# Altium PCB H_Bridge.PcbDoc
Units mm, origin at the board's own origin, x right, y up, seen from the top; angles counter-clockwise.
Board outline 64.9 x 45.34 mm, 2 copper layers (Top Layer, Bottom Layer); 33 components, 27 nets, 131 pads, 157 vias.
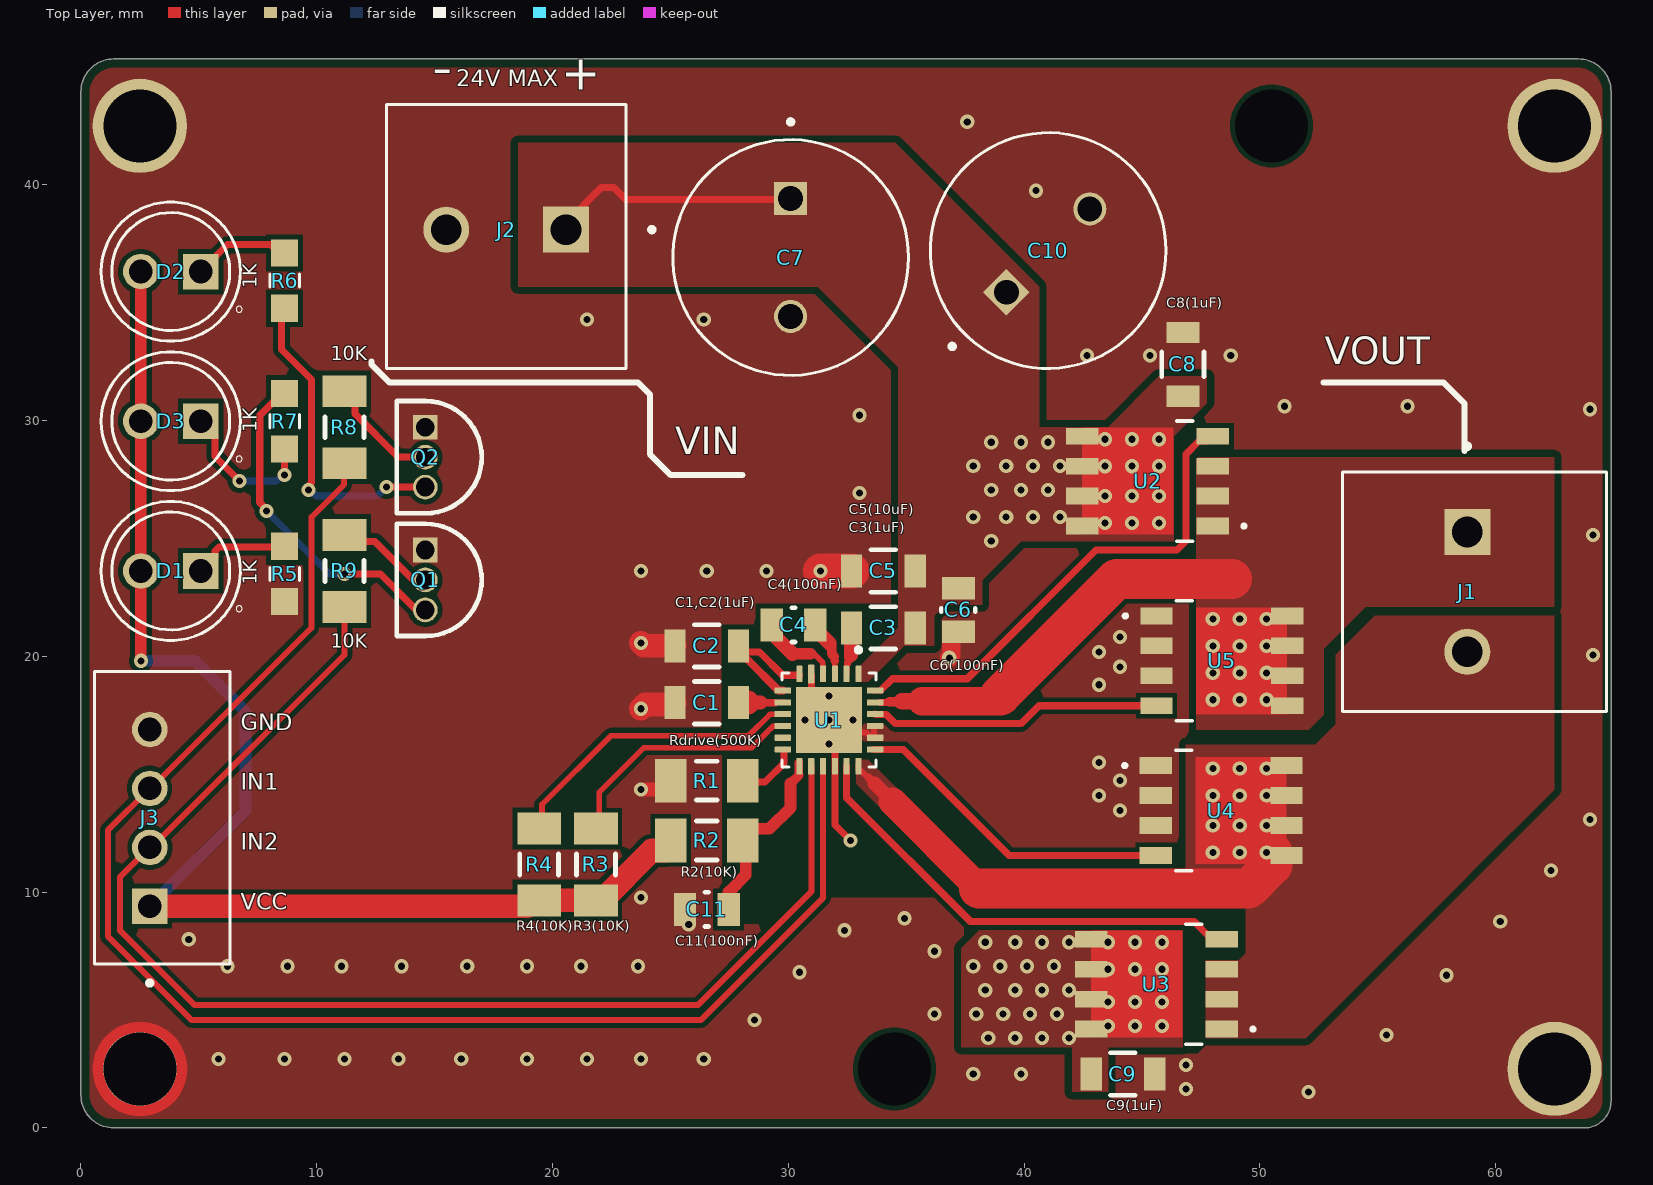
[diagram p0: Top Layer view]
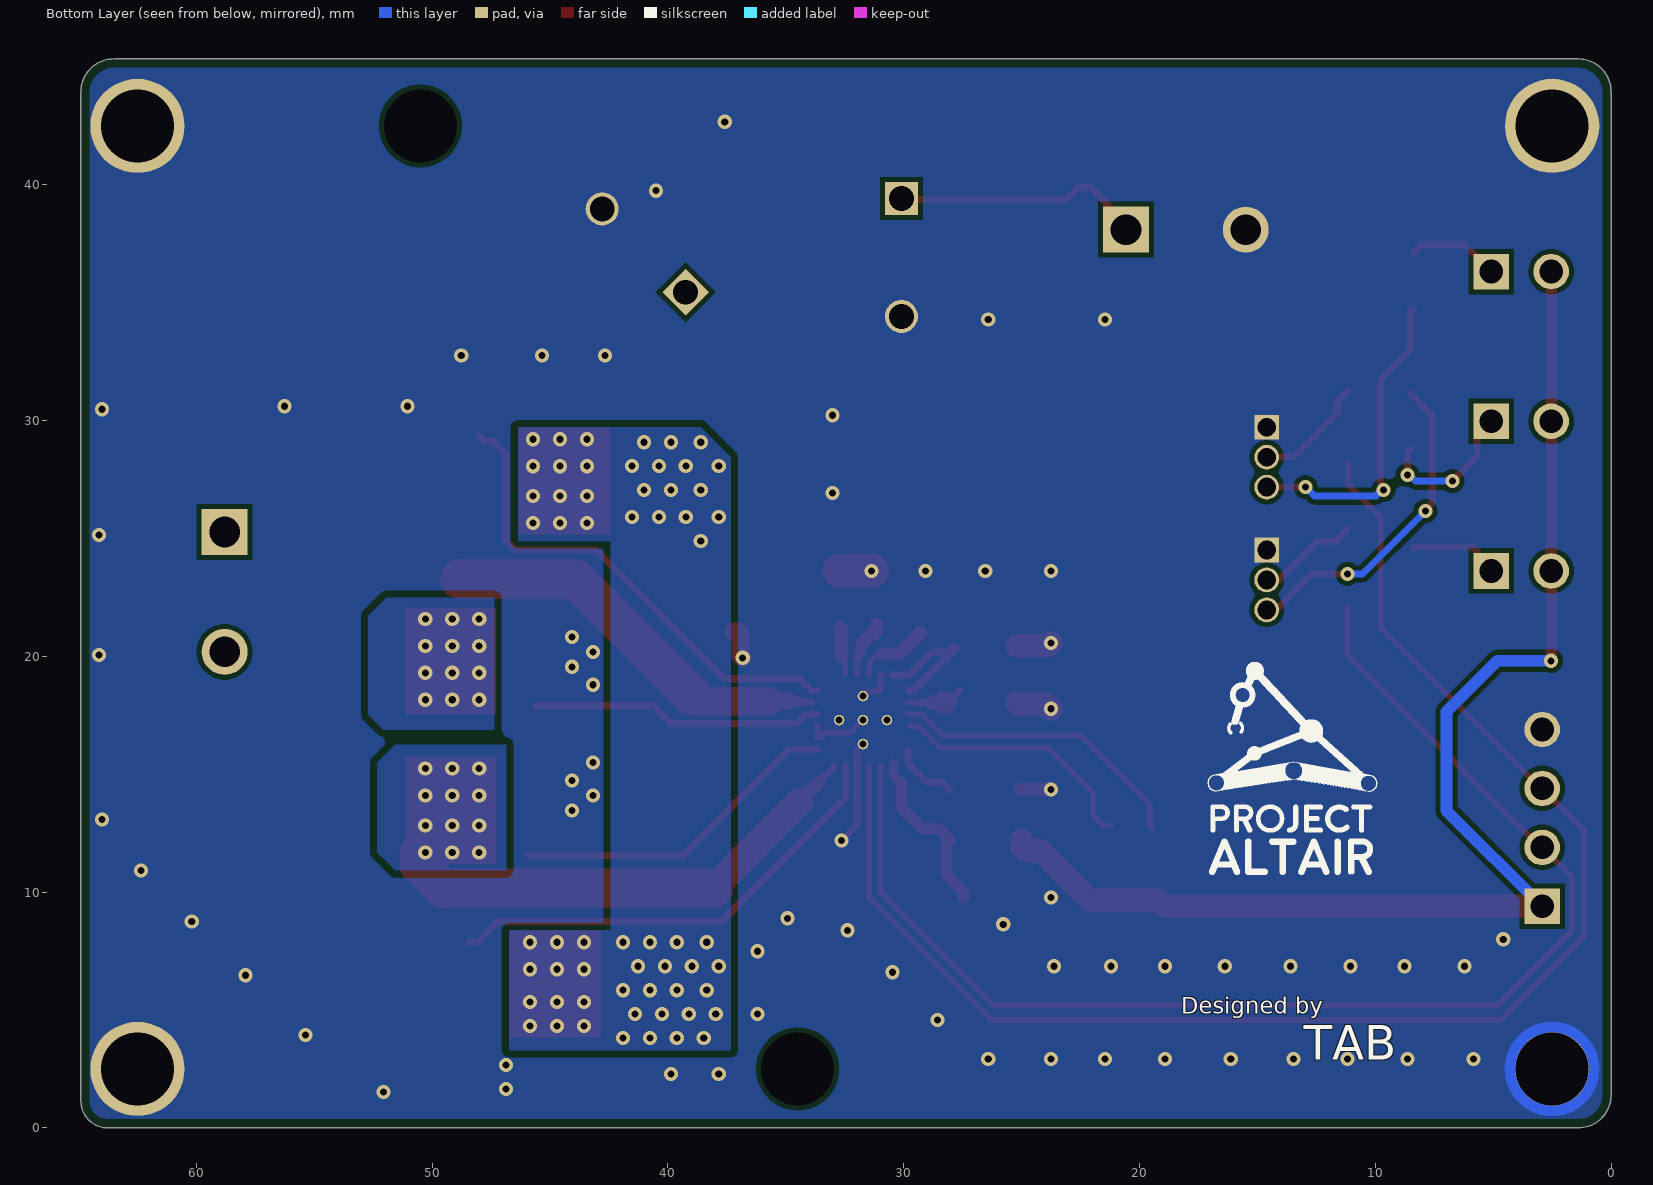
[diagram p1: Bottom Layer view, seen from below]
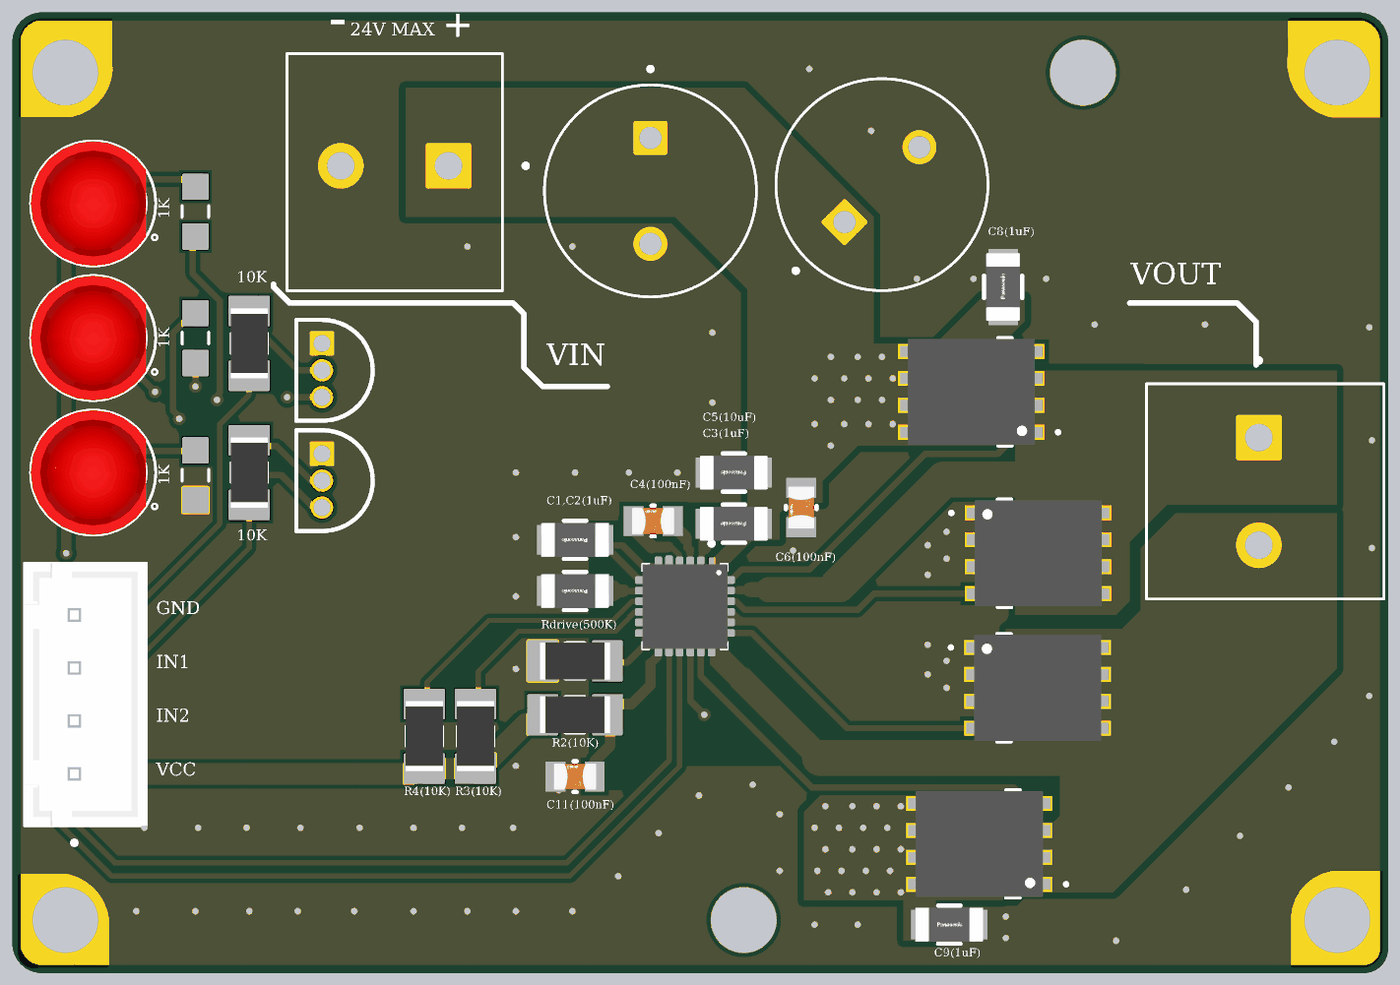
[diagram p2: 3D render of the assembled board from above, using the file's embedded part models]

## Layer stack, top to bottom
Top Solder: solder mask 0.0102, Solder Resist, Dk 3.5
Top Layer: signal copper 0.0356
Dielectric 1: dielectric 0.32, FR-4, Dk 4.8
Bottom Layer: signal copper 0.0356
Bottom Solder: solder mask 0.0102, Solder Resist, Dk 3.5

## Board outline
0,1.397 0,4.128 0,43.434 0,43.942 cw(c1.397,43.942) 1.397,45.34 63.5,45.34 cw(c63.5,43.942) 64.898,43.942 64.898,1.143 cw(c63.754,1.143) 63.754,0 1.397,0 cw(c1.397,1.397)

## Design rules (kind name [scope] priority, off if disabled: settings)
Clearance Clearance_1 [All] p1: gap=0.2 ignorepadtopadclearanceinfootprint=FALSE except(0: Arc-Text Track-Text SMDPad-Text THPad-Text Via-Text Fill-Text Poly-Text Region-Text Text-Text; 0.3: Fill-Fill Fill-Poly Fill-Region Poly-Poly Poly-Region Region-Region)
Clearance [All] p2: gap=0.2 ignorepadtopadclearanceinfootprint=FALSE except(0: Arc-Text Track-Text SMDPad-Text THPad-Text Via-Text Fill-Text Poly-Text Region-Text Text-Text; 0.3: Fill-Fill Fill-Poly Fill-Region Poly-Poly Poly-Region Region-Region)
HoleSize [All] p1: absolutevalues=TRUE maxlimit=6 minlimit=0.2 maxpercent=80.000 minpercent=20.000
HoleToHoleClearance [All] p1: gap=0.4 allowstackedmicrovias=TRUE
PasteMaskExpansion [All] p1: expansion=0.05
PlaneClearance [All] p1: clearance=0.6
PlaneConnect [All] p1: planeconnectstyle=Direct reliefexpansion=0.508 reliefentries=4 reliefconductorwidth=0.254 reliefairgap=0.254
PolygonConnect [All] p1: connectstyle=Direct reliefconductorwidth=0.254 reliefentries=4 polygonreliefangle="90 Angle" airgapwidth=0.254
RoutingVias [All] p1: holewidth=0.6 width=0.8 viastyle="Through Hole" minholewidth=0.2 minwidth=0.45 maxholewidth=6 maxwidth=6
SolderMaskExpansion [All] p1: expansion=0.102 istentingtop=FALSE
UnRoutedNet [All] p1: checkbadconnections=TRUE
Width [All] p1: maxlimit=2 minlimit=0.2 preferedwidth=0.254
24 further rules are at their usual default settings.

## Components (designator, comment, footprint, x,y, rotation, side; value= is the part's Value field where it differs from the comment)
C1 "1uF/35V" FP-ECHUH3-MFG 26.543,18.034 r180 top
C2 "1uF/35V" FP-ECHUH3-MFG 26.543,20.447 r180 top
C3 "1uF/35V" FP-ECHUH3-MFG 34.036,21.209 r180 top
C4 "100nF/50V" FP-CC0805-0_85-MFG 30.226,21.336 r180 top value="1 uF"
C5 "10uF/35V" FP-ECHUH3-MFG 34.036,23.622 r180 top
C6 "100nF/50V" FP-CC0805-0_85-MFG 37.211,21.971 r270 top value="1 uF"
C7 "470uF/35V" CAPPRD500W80D1000H1170 30.099,36.917 r270 top
C8 "1uF/35V" FP-ECHUH3-MFG 46.736,32.385 r90 top
C9 "1uF/35V" FP-ECHUH3-MFG 44.196,2.286 r0 top
C10 "470uF/35V" CAPPRD500W80D1000H1170 41.021,37.211 r45 top
C11 "100nF/50V" FP-CC0805-0_85-MFG 26.543,9.271 r180 top value="1 uF"
D1 "WP7113ID" LED_WP7113ID 3.81,23.622 r180 top
D2 "WP7113ID" LED_WP7113ID 3.81,36.322 r180 top
D3 "WP7113ID" LED_WP7113ID 3.81,29.972 r180 top
J1 "1711725" PHOENIX_1711725 53.501,27.813 r270 top
J2 "1711725" PHOENIX_1711725 23.114,43.4 r180 top
J3 "B4B-XH-A" JST_B4B-XH-A 3.446,13.148 r270 top
Q1 "2N3904BU" FAIR-TO-92 14.605,24.511 r270 top
Q2 "2N3904BU" FAIR-TO-92 14.605,29.718 r270 top
R1 "33K" RESC3216X60X45ML15T20 26.543,14.732 r180 top value=500K
R2 "10K" RESC3216X60X45ML15T20 26.543,12.192 r180 top
R3 "10K" RESC3216X60X45ML15T20 21.844,11.176 r90 top
R4 "10K" RESC3216X60X45ML15T20 19.431,11.176 r90 top value=10k
R5 "1K" RES_ERA6AED822V 8.636,23.495 r90 top
R6 "1K" RES_ERA6AED822V 8.636,35.941 r90 top
R7 "1K" RES_ERA6AED822V 8.636,29.972 r90 top
R8 "10K" RESC3216X60X45ML15T20 11.176,29.719 r270 top value=10k
R9 "10K" RESC3216X60X45ML15T20 11.176,23.622 r270 top value=10k
U1 "DRV8701ERGET" QFN50P400X400X100-25N 31.727,17.299 r270 top
U2 "CSD18532Q5B" DNK8 45.236,27.432 r180 top
U3 "CSD18532Q5B" DNK8 45.617,6.096 r180 top
U4 "CSD18532Q5B" DNK8 48.363,13.462 r0 top
U5 "CSD18532Q5B" DNK8 48.387,19.812 r0 top

## Footprints (in the part's own frame and the unit in brackets; to place one, negate y for a bottom-side part, rotate by r counter-clockwise, add the part's x,y. Pads: shape width x height; smd on the part's side, far side on the other; paste and mask are expansions set on the pad)
CAPPRD500W80D1000H1170 [mm]
  round 1.4 hole 1.05: N(2.5,0)
  rect 1.4x1.4 / inner round 1.4 / far side rect 1.4x1.4 hole 1.05: P(-2.5,0)
  silkscreen extent -5.85,-5 5,5
DNK8 [mm]
  rect 1.372x0.71 smd paste-0.673 mask-0.686: 1(-2.77,1.905) 2(-2.77,0.635) 3(-2.77,-0.635) 4(-2.77,-1.905) 5(2.77,-1.905) 6(2.77,-0.635) 7(2.77,0.635) 8(2.77,1.905)
  Top Layer region: 2.765,-2.26 2.765,2.26 -1.085,2.26 -1.085,-2.26
  Top Layer region: 2.765,-2.26 2.765,2.26 -1.085,2.26 -1.085,-2.26
  silkscreen extent -1.92,-2.55 -1.25,2.55, body extent -3,-2.5 3,2.5, height 1.06
FAIR-TO-92 [mm] "TO, 3-Leads, Body Dia 4.79mm, Pitch 1.27mm"
  rect 1.05x1.05 hole 0.8 mask+0.05: 1(0,0)
  round 1.05 hole 0.8 mask+0.05: 2(1.27,0) 3(2.54,0)
  silkscreen extent -1.11,-1.21 3.65,2.4, body extent -1.11,-1.21 3.65,2.4, height 5.33
FP-CC0805-0_85-MFG [mm]
  rect 0.95x1.4 smd paste+0 mask+0: 1(-0.925,0) 2(0.925,0)
  silkscreen extent -0.08,-0.72 0.08,0.72, body extent -1.6,-1.05 1.6,1.05, height 0.25
FP-ECHUH3-MFG [mm]
  rect 0.9x1.4 smd paste+0 mask+0: 1(-1.35,0) 2(1.35,0)
  silkscreen extent -0.53,-0.9 0.53,0.9, body extent -1.9,-1 1.9,1, height 0.25
JST_B4B-XH-A [mm]
  rect 1.508x1.508 / inner round 1.508 / far side rect 1.508x1.508 hole 1: 1(3.75,-0.525)
  round 1.508 hole 1: 2(1.25,-0.525) 3(-1.25,-0.525) 4(-3.75,-0.525)
  silkscreen extent -6.2,-2.88 7.1,2.88, body extent -6.2,-2.88 6.2,2.88, height 7
LED_WP7113ID [mm]
  round 1.508 hole 1: A(1.27,0)
  rect 1.508x1.508 / inner round 1.508 / far side rect 1.508x1.508 hole 1: C(-1.27,0)
  silkscreen extent -3.03,-2.95 2.95,2.95, body extent -2.5,-2.95 2.95,2.95, height 9.6
PHOENIX_1711725 [mm]
  rect 1.95x1.95 / inner round 1.95 / far side rect 1.95x1.95 hole 1.3: 1(2.54,5.3)
  round 1.95 hole 1.3: 2(7.62,5.3)
  silkscreen extent -1.2,0 10.16,11.2
QFN50P400X400X100-25N [mm]
  rrect25% 0.7x0.26 smd paste+0 mask+0.051: 1(-1.955,1.25)
  rrect25% 0.7x0.26 smd mask+0.051: 2(-1.955,0.75) 3(-1.955,0.25) 4(-1.955,-0.25) 6(-1.955,-1.25) 13(1.955,-1.25) 14(1.955,-0.75) 15(1.955,-0.25) 16(1.955,0.25) 17(1.955,0.75) 18(1.955,1.25)
  rrect25% 0.81x0.26 smd mask+0.051: 5(-1.955,-0.75)
  rrect25% 0.26x0.7 smd mask+0.051: 7(-1.25,-1.955) 8(-0.75,-1.955) 9(-0.25,-1.955) 10(0.25,-1.955) 11(0.75,-1.955) 12(1.25,-1.955) 19(1.25,1.955) 20(0.75,1.955) 21(0.25,1.955) 22(-0.25,1.955) 23(-0.75,1.955) 24(-1.25,1.955)
  rect 2.8x2.8 smd paste-2 mask+0.051: 25(0,0)
  round 0.45 hole 0.3 mask+0: 26(0,1.016) 27(-1.016,0) 28(0,0) 29(1.016,0) 30(0,-1.016)
  silkscreen extent -3.07,-2 2,2, body extent -2,-2 2,2, height 1
RES_ERA6AED822V [mm]
  rect 1.15x1.15 smd: 1(-1.175,0) 2(1.175,0)
  silkscreen extent -0.28,-0.63 0.28,0.63
RESC3216X60X45ML15T20 [mm] "Chip Resistor, 2-Leads, Body 3.3x1.75mm, IPC Low Density"
  rect 1.35x1.85 smd: 1(-1.525,0) 2(1.525,0)
  silkscreen extent -0.45,-0.82 0.45,0.82, body extent -1.65,-0.87 1.65,0.87, height 0.6

## Part data
C1 C3 C8 C9: library part CMP-05434-000006-1, "1uF/35V MLCC", Capacitance=47nF, Case Code (Imperial)=1206, Case Code (Metric)=3216, Dielectric=PPS, Dielectric Material=Polyphenylene, Insulation Resistance=3GR, Max Operating Temperature=125°C, Min Operating Temperature=-55°C, Package Quantity=2000, Tolerance=2%, Voltage=16V, Case/Package=1206, Construction=Flat, Contact Plating=Copper, Depth=1.6mm, Height=1.5mm, Height - Seated (Max)=0.067inch, Lead Free="Lead Free", Length=3.2mm, Life (Hours)=500Hour, Mount="Surface Mount", Packaging="Tape and Reel", Radiation Hardening=No, REACH SVHC="No SVHC", RoHS Compliant=Yes, Series=ECHU(X), Termination=SMD/SMT, Voltage Rating=16V, Voltage Rating (DC)=16V, Weight=0.000353oz, Width=0.063inch
C2: library part CMP-05434-000006-1, "1uF/35V MLCC", Capacitance=1uF, Case Code (Imperial)=1206, Case Code (Metric)=3216, Dielectric=PPS, Dielectric Material=Polyphenylene, Insulation Resistance=3GR, Max Operating Temperature=125°C, Min Operating Temperature=-55°C, Package Quantity=2000, Tolerance=2%, Voltage=16V, Case/Package=1206, Construction=Flat, Contact Plating=Copper, Depth=1.6mm, Height=1.5mm, Height - Seated (Max)=0.067inch, Lead Free="Lead Free", Length=3.2mm, Life (Hours)=500Hour, Mount="Surface Mount", Packaging="Tape and Reel", Radiation Hardening=No, REACH SVHC="No SVHC", RoHS Compliant=Yes, Series=ECHU(X), Termination=SMD/SMT, Voltage Rating=16V, Voltage Rating (DC)=16V, Weight=0.000353oz, Width=0.063inch
C4 C6 C11: library part CMP-03422-001106-1, "100nF/50V MLCC", Capacitance="1 uF", Manufacturer=Yageo, Manufacturer Part Number=CC0805MKX7R6BB105, Package=CC0805-0.85, Temperature="-30°C to +85°C", Temperature Characteristic=X7R, Temperature Range High=+85°C, Temperature Range Low=-30°C, Tolerance=0.2, Voltage Rating="10 V", Automotive=No, Category=Cap, ComponentLink2Description=Datasheet, ComponentLink2URL=http://www.yageo.com/documents/recent/UPY-GPHC_Y5V_6.3V-to-50V_8.pdf, Device Class L1="Passive Components", Device Class L2=Capacitors, Device Class L3="Ceramic Capacitors", Digikey Description="CAP CER 1UF 10V X7R 0805", Footprint Url=http://www.yageo.com/exep/pages/download/literatures/UPY-C_GEN_24.pdf, Height=0.95mm, Ipc Land Pattern Name=CAPC200125X85, Lead Free=Yes, Material=Ceramic, Mouser Description="Multilayer Ceramic Capacitors MLCC - SMD/SMT 1.0uF 10V X7R 20%", Octopart=https://octopart.com/cc0805mkx7r6bb105-yageo-71334590, RoHS=TRUE
C5: library part CMP-05434-000006-1, "10uF/35V MLCC", Capacitance=47nF, Case Code (Imperial)=1206, Case Code (Metric)=3216, Dielectric=PPS, Dielectric Material=Polyphenylene, Insulation Resistance=3GR, Max Operating Temperature=125°C, Min Operating Temperature=-55°C, Package Quantity=2000, Tolerance=2%, Voltage=16V, Case/Package=1206, Construction=Flat, Contact Plating=Copper, Depth=1.6mm, Height=1.5mm, Height - Seated (Max)=0.067inch, Lead Free="Lead Free", Length=3.2mm, Life (Hours)=500Hour, Mount="Surface Mount", Packaging="Tape and Reel", Radiation Hardening=No, REACH SVHC="No SVHC", RoHS Compliant=Yes, Series=ECHU(X), Termination=SMD/SMT, Voltage Rating=16V, Voltage Rating (DC)=16V, Weight=0.000353oz, Width=0.063inch
C7 C10: library part EEHAZSV471UB, Package=None, Availability=Unavailable, MF="{'manufacturer': u'Panasonic Electronic Components'}", MP=EEHAZSV471UB, Price=None
D1 D2 D3: "Red 617nm LED Indication - Discrete 2V Radial", Package="Radial Kingbright", Availability="In Stock", Check_prices=https://www.snapeda.com/parts/WP7113ID/Kingbright/view-part/?ref=eda, MF=Kingbright, MP=WP7113ID, Price=None, Purchase-URL=https://pricing.snapeda.com/search/part/WP7113ID/?ref=eda, SnapEDA_Link=https://www.snapeda.com/parts/WP7113ID/Kingbright/view-part/?ref=snap
J1 J2: "PCB Terminal Screw 5.08mm 12AWG 400V 24A 2 Position COMBICON MKDS Series", Package=None, Check_prices=https://www.snapeda.com/parts/1711725/Phoenix+Contact/view-part/?ref=eda, MF="Phoenix Contact", MP=1711725, SnapEDA_Link=https://www.snapeda.com/parts/1711725/Phoenix+Contact/view-part/?ref=snap
J3: "Connector Header Through Hole 4 position 0.098 (2.50mm)", Package=None, Check_prices=https://www.snapeda.com/parts/B4B-XH-A/JST/view-part/?ref=eda, MF="JST Sales", MP=B4B-XH-A, SnapEDA_Link=https://www.snapeda.com/parts/B4B-XH-A/JST/view-part/?ref=snap
Q1 Q2: library part CMP-2000-04944-1, "NPN General-Purpose Amplifier, 40 V VCEO, 0.2 A, -55 to 150 degC, 2-Pin TO-92, RoHS, Bulk", Manufacturer=FairchildSemiconductor, Maximum Collector Base Voltage=60V, Maximum Collector Emitter Saturation Voltage=0.2@1mA@10mA, Maximum Collector Emitter Voltage=40V, Maximum DC Collector Current=0.2A, Maximum Operating Frequency=300(Min)MHz, Maximum Power Dissipation=625mW, Minimum DC Current Gain=40@0.1mA@1V, Operating Temperature=-55to150degC, Package=3TO-92, Package Description="3-Pin Transistor Outline Package, Body Dia 4.79 mm, Pitch 1.27 mm", Package Reference=TO-92, Category=GPBJT, Datasheet URL=https://datasheet.ciiva.com/4722/2n3904-82270-4722369.pdf, Datasheet Version="Rev. 1.1.0, 10/2014", Manufacturer URL=https://www.fairchildsemi.com/, Mounting=ThroughHole, Packaging=Bulk, Pin Count=3, Rad Hard=No, Type=NPN
R1 R2 R3: library part CMP-009-00025-5, "Chip Resistor, 100 KOhm, +/- 1%, 0.25 W, -55 to 155 degC, 1206 (3216 Metric)", Case/Package=1206, Max Operating Temperature=155°C, Min Operating Temperature=-55°C, Power=250mW, Tolerance=1%, Voltage Rating=200V, Mounting Technology=SM, Pins=2, RoHS Compliant=True
R4 R8 R9: library part CMP-009-00025-5, "10K 1206", Case/Package=1206, Max Operating Temperature=155°C, Min Operating Temperature=-55°C, Power=250mW, Tolerance=1%, Voltage Rating=200V, Mounting Technology=SM, Pins=2, RoHS Compliant=True
R5 R6 R7: library part ERA6AED822V, Package=None, Availability=Unavailable, MP=ERA6AED822V, Price=None
U1: "47-V H-bridge smart gate driver", Package="QFN-24 Texas Instruments", Availability="In Stock", Check_prices=https://www.snapeda.com/parts/DRV8701ERGET/Texas+Instruments/view-part/?ref=eda, MF="Texas Instruments", MP=DRV8701ERGET, Price=None, Purchase-URL=https://pricing.snapeda.com/search/part/DRV8701ERGET/?ref=eda, SnapEDA_Link=https://www.snapeda.com/parts/DRV8701ERGET/Texas+Instruments/view-part/?ref=snap
U2 U3 U4 U5: "60-V, N channel NexFETâ„¢ power MOSFET, single SON 5 mm x 6 mm, 3.2 mOhm 8-VSON-CLIP -55 to 150", Manufacturer_Name="Texas Instruments", Copyright="Copyright (C) 2025 Ultra Librarian. All rights reserved.", Manufacturer_Part_Number=CSD18532Q5B, RefDes=RefDes, Type=Type

## Free pads (board coordinates)
  round 3.125 / inner round 1.524 / far side round 3.125 hole 3.1 mask-2539.97: 4(2.5,2.5)
  round 4 / inner round 1.524 / far side round 4 hole 3.1 mask-2539.97: 4(2.5,42.5) 4(62.5,2.5) 4(62.5,42.5)
  round 0 / inner round 1.524 / far side round 0 hole 3.1 mask-2539.97: M3_1(50.5,42.5) M3_2(34.5,2.5)
  round 0.5 on Top Overlay: ""(2.54,25.019) ""(2.54,31.369) ""(2.54,37.719)

## Via types
v1: diameter 0.6, hole 0.3, Top Layer to Bottom Layer, tented top, 157 vias

## Nets (pads, with @x,y where several pads share a name; then routed paths per layer and width w, separated by ;. In a path a pad name is that pad's centre, name@x,y a point inside that pad or via, vN(x,y) a via of type N, cw(c..) or ccw(c..) an arc to the next point about the centre after c; other vN are vias at no path point)
AVDD: C2.1 U1.6 U1.7 | length 5.8
  Top Layer w0.3: C2.1 28.148,20.193 28.775,20.193 29.768,19.199 U1.6@30.477,19.199
  Top Layer w0.34: C2.1@27.768,20.322 28.173,19.917 28.216,19.917 29.584,18.549 U1.7
CPL: C4.2 U1.4 | length 3.2
  Top Layer w0.24: 30.945,20.109 31.091,20.109 31.467,19.733 31.467,19.264 U1.4
  Top Layer w0.5: 30.176,20.109 30.945,20.109
  Top Layer w0.6: C4.2@29.301,20.984 30.176,20.109
DVDD: C1.1 U1.8 | length 2.2
  Top Layer w0.24: U1.8@29.464,18.034 29.479,18.049 U1.8@29.827,18.049
  Top Layer w0.3: C1.1@27.593,18.584 27.893,18.284 C1.1 ; 28.82,18.044 28.829,18.034 U1.8@29.464,18.034
  Top Layer w0.6: C1.1@28.284,18.044 28.82,18.044
  Top Layer w1: C1.1@28.274,18.034 C1.1@28.284,18.044
FAULT: R4.2 U1.9 | length 12.9
  Top Layer w0.24: R4.2 19.558,12.828 19.558,13.716 22.478,16.636 28.32,16.636 29.223,17.539 29.817,17.539 U1.9@29.827,17.549
GH1: U1.17 U3.4 | length 19.8
  Top Layer w0.3: U1.17 32.477,14.005 37.719,8.763 47.212,8.763 47.851,8.124 47.851,8.079 48.056,7.874 U3.4@48.387,7.874
GH2: U1.24 U2.4 | length 21
  Top Layer w0.24: U1.24@33.627,18.549 U1.24@33.916,18.549
  Top Layer w0.3: U1.24@33.916,18.549 34.417,19.05 37.592,19.05 43.053,24.511 46.482,24.511 46.863,24.892 46.863,28.575 47.42,29.132 47.801,29.132 U2.4
GL1: U1.19 U4.4 | length 14.2
  Top Layer w0.3: U1.19@33.627,16.049 34.878,16.049 39.37,11.557 U4.4@45.921,11.557
GL2: U1.22 U5.4 | length 12.4
  Top Layer w0.3: U1.22 33.702,17.529 34.158,17.529 34.542,17.145 39.878,17.145 40.64,17.907 U5.4
GND: C1.2 C2.2 C5.2 C6.2 C7.N C8.2 C9.2 C10.N C11.2 J2.2 J3.4 pad.4 Q1.1 Q2.1 R1.2 R5.1 U1.5 U1.16 U1.20 U1.21 U1.25 U1.26 U1.27 U1.28 U1.29 U1.30 U4.1 U4.2 U4.3 U5.1 U5.2 U5.3 | length 15.8
  Top Layer w0.254: U1.25 32.254,16.772 33.311,16.772 33.459,16.624 33.459,16.552 33.462,16.549 U1.20 ; U1.20@33.627,16.549 33.627,17.049 U1.21
  Top Layer w0.3: U1.5@30.977,19.199 30.977,18.549 U1.25@31.727,18.449 ; U1.29 31.977,16.033 31.977,12.854 v1(32.639,12.192)
  Top Layer w0.6: v1(23.749,14.351) R1.2@25.018,14.351
  Top Layer w0.8: v1(36.83,19.939) 36.911,20.02 36.911,20.971 36.986,21.046 C6.2
  Top Layer w1: v1(23.749,17.78) 23.927,17.958 25.143,17.958 25.143,17.984 C1.2 ; v1(23.749,20.574) 23.864,20.46 25.181,20.46 C2.2
  Top Layer w1.5: v1(31.369,23.622) C5.2
  other v1: 52.07,1.524 46.863,1.651 37.846,2.286 39.878,2.286 46.863,2.667 5.842,2.921 8.636,2.921 11.176,2.921 13.462,2.921 16.129,2.921 18.923,2.921 21.463,2.921 23.749,2.921 26.416,2.921 55.372,3.937 28.575,4.572 36.195,4.826 57.912,6.477 30.48,6.604 6.223,6.858 8.763,6.858 11.049,6.858 13.589,6.858 16.383,6.858 18.923,6.858 21.209,6.858 23.622,6.858 36.195,7.493 4.572,8.001 32.385,8.382 25.781,8.636 60.198,8.763 34.925,8.89 23.749,9.779 62.357,10.922 64.008,13.081 44.069,13.462 43.18,14.097 44.069,14.732 43.18,15.494 43.18,18.796 44.069,19.558 64.135,20.066 43.18,20.193 44.069,20.828 23.749,23.622 26.543,23.622 29.083,23.622 64.135,25.146 33.02,26.924 33.02,30.226 64.008,30.48 51.054,30.607 56.261,30.607 42.672,32.766 45.339,32.766 48.768,32.766 21.463,34.29 26.416,34.29 40.513,39.751 37.592,42.672
IDRIVE: R1.1 U1.12 | length 2.8
  Top Layer w0.3: R1.1@28.068,14.351 28.384,14.667 29.018,14.667 29.827,15.476 U1.12@29.827,16.029
IN1: J3.3 R8.2 U1.15 | length 63.8
  Top Layer w0.254: R8.2 11.158,28.175 11.158,27.287 9.779,25.908 9.779,21.209 2.968,14.398 J3.3 1.143,12.62 1.143,8.128 4.699,4.572 26.289,4.572 31.477,9.76 U1.15
IN2: J3.2 R9.2 U1.14 | length 55.7
  Top Layer w0.254: R9.2 11.176,20.066 3.008,11.898 J3.2 1.651,10.628 1.651,8.382 4.826,5.207 26.162,5.207 30.977,10.022 U1.14
NetC4_1: C4.1 U1.3 | length 2.5
  Top Layer w0.24: U1.3@31.972,19.204 31.972,19.812
  Top Layer w0.35: 31.962,19.863 31.962,19.822 31.972,19.812
  Top Layer w0.4: 31.736,20.562 31.836,20.462 31.836,20.107 31.962,19.981
  Top Layer w0.5: 31.736,20.479 31.736,20.562
  Top Layer w0.6: C4.1 31.151,21.111 31.326,20.936 31.362,20.936 31.736,20.562
NetD1_C: D1.C R5.2 | length 4.2
  Top Layer w0.3: D1.C@4.826,23.622 D1.C 5.684,24.226 5.684,24.463 5.86,24.638 8.287,24.638 R5.2@8.382,24.543
NetD2_C: D2.C R6.2 | length 3.9
  Top Layer w0.3: D2.C 6.223,37.465 8.033,37.465 R6.2@8.382,37.116
NetD3_C: D3.C R7.1 | length 6.4
  Top Layer w0.3: D3.C 5.684,29.368 5.684,28.479 v1(6.731,27.432) ; R7.1@8.509,28.797 8.636,28.67 v1(8.636,27.686)
  Bottom Layer w0.3: v1(6.731,27.432) 8.301,27.432 8.555,27.686 v1(8.636,27.686)
NetQ1_2: Q1.2 R9.1 | length 4.3
  Top Layer w0.3: R9.1@11.176,25.4 11.701,24.875 12.463,24.875 14.097,23.241 Q1.2
NetQ1_3: Q1.3 R7.2 | length 13.6
  Top Layer w0.3: v1(7.874,26.162) 7.874,26.234 7.584,26.524 7.584,30.222 R7.2@8.509,31.147 ; v1(11.176,23.495) 12.7,23.495 Q1.3@14.224,21.971
  Bottom Layer w0.3: v1(7.874,26.162) 10.541,23.495 v1(11.176,23.495)
NetQ2_2: Q2.2 R8.1 | length 4.5
  Top Layer w0.3: R8.1 11.617,30.803 11.617,30.294 13.454,28.457 14.216,28.457 Q2.2@14.224,28.448
NetQ2_3: Q2.3 R6.1 | length 13.6
  Top Layer w0.3: R6.1@8.382,34.766 8.509,34.639 8.509,33.02 9.779,31.75 9.779,27.377 9.71,27.308 9.71,27.109 v1(9.652,27.051) ; v1(12.954,27.178) Q2.3
  Bottom Layer w0.3: v1(9.652,27.051) 9.724,27.051 9.978,26.797 12.573,26.797 v1(12.954,27.178)
NetR3_2: R3.2 U1.10 | length 10.9
  Top Layer w0.24: R3.2@21.198,12.816 21.537,12.816 21.978,13.256 21.978,14.231 23.876,16.129 28.448,16.129 29.102,16.783 29.102,16.793 29.349,17.039 29.762,17.039 U1.10
nSLEEP: C11.1 R2.1 U1.13 | length 7.5
  Top Layer w0.35: 30.447,14.953 U1.13@30.447,15.494
  Top Layer w0.4: 30.099,14.605 30.447,14.953
  Top Layer w0.5: C11.1@27.468,9.779 27.468,10.004 28.194,10.73 28.194,12.066 R2.1 28.068,12.265 28.493,12.69 29.2,12.69 30.099,13.589 30.099,14.605
OUT1: J1.2 U1.18 U3.1 U3.2 U3.3 U4.5 U4.6 U4.7 U4.8 | length 21.6
  Top Layer w0.24: U1.18@32.977,15.399 32.977,15.219 33.009,15.219 33.369,14.859 33.401,14.859
  Top Layer w0.35: 33.401,14.859 33.655,14.605
  Top Layer w0.6: 33.655,14.605 34.417,13.843
  Top Layer w1.2: 34.417,13.843 38.101,10.16
  Top Layer w1.5: 48.514,12.827 v1(49.149,12.827)
  Top Layer w1.7: 38.101,10.16 44.465,10.16 44.472,10.152 49.527,10.152 50.53,11.156 50.53,11.684 v1(50.292,11.684)
  other v1: 48.006,11.684 49.149,11.684 48.006,12.827 50.292,12.827 48.006,14.097 49.149,14.097 50.292,14.097 48.006,15.24 49.149,15.24 50.292,15.24
OUT2: J1.1 U1.23 U2.1 U2.2 U2.3 U5.5 U5.6 U5.7 U5.8 | length 17.1
  Top Layer w0.3: U1.23@33.882,18.049 34.26,18.049 34.29,18.079
  Top Layer w0.4: 34.29,18.079 34.713,18.079 34.758,18.034
  Top Layer w0.7: 34.819,18.095 35.687,18.095
  Top Layer w1.2: 35.687,18.095 38.739,18.095 38.989,18.345
  Top Layer w1.7: 38.989,18.345 43.933,23.289 48.816,23.289
  other v1: 48.006,18.161 49.149,18.161 50.292,18.161 48.006,19.304 49.149,19.304 50.292,19.304 48.006,20.447 49.149,20.447 50.292,20.447 48.006,21.59 49.149,21.59 50.292,21.59
VCC: D1.A D2.A D3.A J3.1 R2.2 R3.1 R4.1 | length 55.2
  Top Layer w0.5: v1(2.54,19.812) D1.A D3.A D2.A
  Top Layer w1: J3.1 18.928,9.398 19.181,9.651 R4.1 R3.1 22.094,9.651 24.21,11.767 24.843,11.767 25.018,11.942 R2.2
  Bottom Layer w0.5: v1(2.54,19.812) 4.826,19.812 6.985,17.653 6.985,13.462 J3.1
VCP: C3.2 U1.2 | length 2.2
  Top Layer w0.24: U1.2 32.487,19.264 32.487,19.66 32.512,19.685
  Top Layer w0.3: 32.512,19.685 32.512,19.745 32.639,19.872 32.639,20.035
  Top Layer w0.4: 32.562,19.951 32.562,19.958 32.662,20.058
  Top Layer w0.6: 32.662,20.058 32.662,21.185 C3.2
VM: C3.1 C5.1 C6.1 C7.P C8.1 C9.1 C10.P J2.1 U1.1 U2.5 U2.6 U2.7 U2.8 U3.5 U3.6 U3.7 U3.8 | length 10.4
  Top Layer w0.3: J2.1@20.574,38.388 22.064,39.878 22.606,39.878 23.115,39.37 30.052,39.37 C7.P
  other v1: 38.481,3.81 39.624,3.81 40.767,3.81 41.91,3.81 43.561,4.318 44.704,4.318 45.847,4.318 37.973,4.826 39.116,4.826 40.259,4.826 41.402,4.826 43.561,5.334 44.704,5.334 45.847,5.334 38.354,5.842 39.624,5.842 40.767,5.842 41.91,5.842 43.561,6.731 44.704,6.731 45.847,6.731 37.846,6.858 38.989,6.858 40.132,6.858 41.275,6.858 38.354,7.874 39.624,7.874 40.767,7.874 41.91,7.874 43.561,7.874 44.704,7.874 45.847,7.874 38.608,24.892 43.434,25.654 44.577,25.654 45.72,25.654 37.846,25.908 39.243,25.908 40.386,25.908 41.529,25.908 43.434,26.797 44.577,26.797 45.72,26.797 38.608,27.051 39.878,27.051 41.021,27.051 37.846,28.067 39.243,28.067 40.386,28.067 41.529,28.067 43.434,28.067 44.577,28.067 45.72,28.067 38.608,29.083 39.878,29.083 41.021,29.083 43.434,29.21 44.577,29.21 45.72,29.21
pads on no net: U1.11

## Polygon pours and split planes (outlines as drawn)
GND on Top Layer "NONET_L-01_P-001" (solid, pour order 77): 1.397,44.958 63.5,44.958 cw(c63.5,43.942) 64.516,43.942 64.516,1.143 cw(c63.754,1.143) 63.754,0.381 1.397,0.381 cw(c1.397,1.397) 0.381,1.397 0.381,43.942 cw(c1.397,43.942)
GND on Top Layer "NONET_L-01_P-001" (solid, pour order 59): 1.397,44.958 63.5,44.958 cw(c63.5,43.942) 64.516,43.942 64.516,1.143 cw(c63.754,1.143) 63.754,0.381 1.397,0.381 cw(c1.397,1.397) 0.381,1.397 0.381,43.942 cw(c1.397,43.942)
OUT2 on Top Layer "OUT2_L01_P041" (solid, pour order 41): 47.302,28.449 47.302,16.891 52.07,16.891 52.705,17.526 52.705,20.32 54.483,22.098 62.484,22.098 62.484,28.448
OUT1 on Top Layer "OUT1_L01_P042" (solid, pour order 42): 46.863,16.256 46.863,10.795 58.928,10.795 62.484,14.351 62.484,21.717 54.864,21.717 53.213,20.066 53.213,17.116 52.353,16.256
VM on Top Layer "VM_L01_P044" (solid, pour order 44): 18.542,41.783 18.542,35.687 31.242,35.687 34.671,32.258 34.671,23.622 40.64,29.591 40.64,35.687 34.544,41.783
OUT1 on Top Layer "OUT1_L01_P058" (solid, pour order 58): 32.893,15.621 32.893,14.605 34.163,13.335 34.925,14.097 33.401,15.621
VM on Top Layer "VM_L01_P054" (solid, pour order 54): 46.228,29.21 47.752,30.734 47.752,31.877 45.72,31.877 43.561,29.718 43.561,29.21
VM on Top Layer "VM_L01_P052" (solid, pour order 52): 42.037,1.524 43.561,1.524 43.561,3.81 42.037,3.81
VM on Top Layer "VM_L01_P033" (solid, pour order 33): 46.736,8.381 46.736,3.429 37.338,3.429 37.338,7.62 38.119,8.401
VM on Top Layer "VM_L01_P036" (solid, pour order 36): 38.862,29.718 46.355,29.718 46.355,24.892 37.973,24.892 37.973,28.829
VM on Top Layer "VM_L01_P037" (solid, pour order 37): 32.893,19.44 32.893,18.923 33.401,18.923 34.925,20.447 36.195,20.447 36.195,21.717 36.703,22.225 36.733,22.196 38.218,22.196 38.218,23.232 39.878,24.892 41.91,24.892 41.91,29.718 38.608,29.718 34.671,25.781 34.671,21.218
OUT1 on Top Layer "OUT1_L01_P043" (solid, pour order 43): 47.701,7.112 47.701,3.81 51.943,3.81 59.055,10.922 49.403,10.922 49.403,7.416 49.099,7.112
GND on Bottom Layer "NONET_L-01_P-001" (solid, pour order 81): 1.397,44.958 63.5,44.958 cw(c63.5,43.942) 64.516,43.942 64.516,1.143 cw(c63.754,1.143) 63.754,0.381 1.397,0.381 cw(c1.397,1.397) 0.381,1.397 0.381,43.942 cw(c1.397,43.942)
OUT1 on Bottom Layer "NONET_L-01_P-001" (solid, pour order 76): 46.863,16.256 51.562,16.256 52.324,15.494 52.324,11.684 51.562,10.922 46.863,10.922
OUT2 on Bottom Layer "NONET_L-01_P-001" (solid, pour order 75): 47.371,22.479 51.943,22.479 52.705,21.717 52.705,17.526 52.07,16.891 47.371,16.891
VM on Bottom Layer "NONET_L-01_P-001" (solid, pour order 72): 42.418,29.718 46.355,29.718 46.355,24.892 42.418,24.892
VM on Bottom Layer "NONET_L-01_P-001" (solid, pour order 71): 42.418,8.382 46.736,8.382 46.736,3.302 42.418,3.302
VM on Bottom Layer "VM_L02_P034" (solid, pour order 34): 38.608,29.718 37.338,28.448 37.338,3.302 42.418,3.302 42.418,29.718
no net on Bottom Solder "NONET_L-01_P-001" (solid, pour order 83): 37.338,28.448 38.608,29.718 52.07,29.718 52.705,29.083 52.705,4.699 51.308,3.302 37.338,3.302
no net on Top Solder "NONET_L-01_P-001" (solid): 4.546,2.217 4.562,2.215 4.573,0.257 1.271,0.257 cw(c1.026,0.989) 0.255,1.029 0.255,4.689 2.499,4.689 cw(c2.078,2.227) 4.573,2.348
no net on Top Solder "NONET_L-01_P-001" (solid): 4.72,42.806 4.72,45.067 1.418,45.067 ccw(c1.418,43.95) 0.3,43.949 0.3,40.393 2.646,40.393 ccw(c2.351,42.75) 4.726,42.807
no net on Top Solder "NONET_L-01_P-001" (solid): 60.325,2.286 60.325,0.254 63.655,0.254 ccw(c63.655,1.242) 64.643,1.242 64.643,4.826 62.399,4.826 ccw(c62.627,2.532) 60.325,2.414
no net on Top Solder "NONET_L-01_P-001" (solid): 60.183,43.434 60.181,43.435 60.17,45.085 63.5,45.085 cw(c63.5,43.942) 64.643,43.942 64.643,40.386 62.244,40.386 cw(c62.812,42.99)

## Other copper
Top Layer:
  pour cut-out: 46.746,8.001 47.244,8.001 47.371,8.128 47.625,7.874 47.625,3.683 47.753,3.556 47.372,3.175 46.736,3.175
  pour cut-out: 32.258,13.97 36.449,9.779 31.75,9.779 31.75,13.97
  pour cut-out: 27.178,21.336 27.178,8.636 30.353,8.636 30.353,21.336
  pour cut-out: 33.119,16.279 34.008,16.279 34.008,16.406 33.246,16.406
  pour cut-out: 33.147,17.145 34.036,17.145 34.036,17.272 33.274,17.272
  pour cut-out: 38.899,10.922 39.624,10.922 34.29,16.256 33.147,16.256 33.147,15.955
  pour cut-out: 29.972,22.225 34.612,22.225 34.26,20.844 29.972,20.701
  pour cut-out: 29.972,19.05 33.147,18.796 33.147,15.748 29.972,15.494
  region net GND: 2.5,0.5 cw(c2.5,2.5) 0.5,2.5 cw(c2.5,2.5) 2.5,4.5 cw(c2.5,2.5) 4.5,2.5 cw(c2.5,2.5)
Bottom Layer:
  region net GND: 2.5,0.5 cw(c2.5,2.5) 0.5,2.5 cw(c2.5,2.5) 2.5,4.5 cw(c2.5,2.5) 4.5,2.5 cw(c2.5,2.5)

## Silkscreen, mask and mechanical layers (free items; w line width, h text height)
Top Overlay:
  circle w0.152: c49.328,25.527 r0.076
  lines w0.254: 12.319,32.512 12.319,32.385 13.081,31.623 23.622,31.623 24.13,31.115 24.13,28.575 25.019,27.686 28.067,27.686 ; 52.705,31.623 57.785,31.623 58.674,30.734 58.674,28.702
  text "24V MAX" at 15.925,43.947 h1.2
  text "-" at 14.909,43.628 h3
  text "+" at 20.37,43.535 h2.5
  text "1K" at 7.642,35.61 h1 r90
  text "C8(1uF)" at 46.025,34.637 h0.75
  text "10K" at 10.591,32.368 h1
  text "VOUT" at 52.755,32.014 h2
  text "1K" at 7.642,29.514 h1 r90
  text "VIN" at 25.196,28.2 h2
  text "C5(10uF)" at 32.563,25.875 h0.75
  text "C3(1uF)" at 32.563,25.113 h0.75
  text "1K" at 7.642,23.037 h1 r90
  text "C4(100nF)" at 29.134,22.7 h0.75
  text "C1,C2(1uF)" at 25.197,21.938 h0.75
  text "10K" at 10.591,20.176 h1
  text "C6(100nF)" at 35.992,19.271 h0.75
  text "GND" at 6.781,16.644 h1.2
  text "Rdrive(500K)" at 24.942,16.088 h0.75
  text "IN1" at 6.781,14.102 h1.2
  text "IN2" at 6.781,11.565 h1.2
  text "R2(10K)" at 25.45,10.508 h0.75
  text "VCC" at 6.781,9.023 h1.2
  text "R4(10K)" at 18.465,8.222 h0.75
  text "R3(10K)" at 20.878,8.222 h0.75
  text "C11(100nF)" at 25.197,7.587 h0.75
  text "C9(1uF)" at 43.485,0.602 h0.75
Bottom Overlay:
  drawing of 16 lines, arcs and shapes, not listed
  text "Designed by" at 18.238,4.602 h1.2
  text "TAB" at 13.031,2.396 h2.5
Top Solder:
  circle w2: c2.5,42.5 r1
  circle w2: c2.5,2.5 r1
  circle w2: c62.5,2.5 r1
  circle w2: c62.5,42.5 r1
Bottom Solder:
  circle w2: c2.5,42.5 r1
  circle w2: c2.5,2.5 r1
  circle w2: c62.5,2.5 r1
  circle w2: c62.5,42.5 r1
Mechanical 1:
  lines w0.254: 64.77,43.815 64.77,43.942 ; 64.77,43.942 ccw(c63.5,43.942) 63.5,45.212 60.96,45.212 57.531,45.212 53.848,45.212 45.339,45.212 12.065,45.212 10.033,45.212 1.397,45.212 ccw(c1.397,43.942) 0.127,43.942 0.127,43.434 0.127,4.128 0.127,1.397 ccw(c1.397,1.397) 1.397,0.127 10.033,0.127 45.72,0.127 54.229,0.127 57.912,0.127 61.087,0.127 63.754,0.127 ccw(c63.754,1.143) 64.77,1.143 64.77,1.778 64.77,43.942